# EAGLE board rc_rx (EAGLE 7.0.0)

Size 100 x 80 mm. Coordinates in mm from the lower left corner, seen from the top.
Outline: 0,0 100,0 100,80 0,80 0,0
Copper layers (1*16): Top 0.035mm / dielectric 1.5mm / Bottom 0.035mm
Design rules "default": minimum track width 10mil, minimum drill 24mil, track to track 8mil, track to pad 8mil, pad to pad 8mil, via to via 8mil, smd to smd 8mil, copper to edge 40mil, drill to drill 8mil, minimum pad ring 10mil, minimum via ring 8mil, stop-mask expansion 4mil, vias tented up to drill 0mil, thermal gap 10mil

## Footprints (pad centres in the part's own frame; a part is rotated, then mirrored left to right if it is on the bottom)
C025-025X050 = drill 0.813 octagon: 1 -1.27,0; 2 1.27,0
E3,5-8 = drill 0.813 pad 1.6: + -1.778,0 | drill 0.813 pad 1.6 octagon: - 1.778,0
DIL18 = drill 0.813 long: 1 -10.16,-3.81; 2 -7.62,-3.81; 3 -5.08,-3.81; 4 -2.54,-3.81; 5 0,-3.81; 6 2.54,-3.81; 7 5.08,-3.81; 8 7.62,-3.81; 9 10.16,-3.81; 10 10.16,3.81; 11 7.62,3.81; 12 5.08,3.81; 13 2.54,3.81; 14 0,3.81; 15 -2.54,3.81; 16 -5.08,3.81; 17 -7.62,3.81; 18 -10.16,3.81
SOT223 = smd 1.5 x 2: 1 -2.3,-3.15; 2 0,-3.15; 3 2.3,-3.15 | smd 3.8 x 2: 4 0,3.15
1X03 = drill 1.016 long: 1 -2.54,0; 2 0,0; 3 2.54,0
1X05 = drill 1.016 long: 1 -5.08,0; 2 -2.54,0; 3 0,0; 4 2.54,0; 5 5.08,0
3,81/1,4 = drill 1.397 pad 3.81 octagon: 1 0,0
D2PACK = smd 2.083 x 3.81: 1 -2.54,-8.89; 3 2.54,-8.89 | smd 11.43 x 8.89: 2 0,2.54
0204/7 = drill 0.813 octagon: 1 -3.81,0; 2 3.81,0
R1210 = smd 1.6 x 2.7: 1 -1.4,0; 2 1.4,0
S02P = drill 1.016 long: 1 1.25,0; 2 -1.25,0

## Placement (x,y rotation side)
C1  100nF  [C025-025X050]  55.88,36.83 270 top
C2  10uF  [E3,5-8]  50.8,27.94 90 top
IC1  PIC16F1826/27P  [DIL18]  31.75,36.83 0 top
IC2  LD117AS50TR  [SOT223]  49.53,36.83 90 top
JP1  [1X03]  10.16,26.67 270 top
JP2  [1X03]  13.97,26.67 270 top
JP3  [1X03]  17.78,26.67 270 top
JP4  ICSP  [1X05]  36.83,22.86 180 top
JP5  USART  [1X05]  10.16,39.37 270 top
PAD1  [3,81/1,4]  33.02,63.5 0 top
PAD2  [3,81/1,4]  33.02,49.53 0 top
Q1  IRF3704S  [D2PACK]  15.24,53.34 90 top
Q2  IRF3704S  [D2PACK]  50.8,53.34 270 top
R1  220  [0204/7]  30.48,29.21 180 top
R2  0.2  [R1210]  36.83,54.61 90 top
R3  220  [0204/7]  43.18,45.72 0 top
R4  430  [0204/7]  24.13,26.67 270 top
R5  220  [0204/7]  25.4,46.99 180 top
R6  220  [0204/7]  22.86,44.45 180 top
R7  [0204/7]  17.78,36.83 270 top
R8  [0204/7]  15.24,36.83 90 top
R9  430  [0204/7]  33.02,26.67 0 top
R10  430  [0204/7]  44.45,29.21 90 top
R11  430  [0204/7]  45.72,43.18 180 top
R12  0.2  [R1210]  29.21,54.61 90 top
R13  430  [0204/7]  21.59,26.67 90 top
SV1  [S02P]  22.86,63.5 180 top
SV2  [S02P]  43.18,63.5 0 top

## Library data of the parts
C1 C2 = rcl
IC1 = microchip
IC2 = v-reg
JP1-JP5 = pinhead
PAD1 PAD2 = wirepad
Q1 Q2 = transistor-power
R1 R3-R11 R13 = resistor
R2 R12 = eagle-ltspice; SPICEMODEL: NONE; SPICEPREFIX: R
SV1 SV2 = con-amp-mt; OC_FARNELL: unknown; OC_NEWARK: unknown

## Nets
CH1_IN: IC1.7 R9.2
CH2_IN: IC1.9 R10.2
CH3_IN: IC1.10 R11.2
CRR_SNS: Q1.3 R12.2 R13.1
FLT1: IC1.2 R4.1
FLT2: IC1.1 R13.2
GND: C1.2 C2.- IC1.5 IC2.1 JP1.1 JP2.1 JP3.1 JP4.3 JP5.5 PAD2.1 R2.1 R7.1 R12.1
N$1: Q2.1 R1.2 R3.2
N$2: Q1.1 R5.2 R6.2
N$3: Q2.2 SV2.1
N$4: Q1.2 SV1.1
N$5: JP1.3 R9.1
N$6: JP2.3 R10.1
N$7: JP3.3 R11.1
N$8: Q2.3 R2.2 R4.2
P1A: IC1.6 R1.1
P1B: IC1.11 R3.1
P2A: IC1.16 R6.1
P2B: IC1.15 R5.1
PGC: IC1.12 JP4.1
PGD: IC1.13 JP4.2
RTS: JP5.1
RX: JP5.3
TX: IC1.8 JP5.2
V+: C1.1 IC2.3 PAD1.1 R8.2 SV1.2 SV2.2
VBAT_SNS: IC1.3 R7.2 R8.1
VDD: C2.+ IC1.14 IC2.4 JP1.2 JP2.2 JP3.2 JP4.4 JP5.4
VPP: IC1.4 JP4.5

## Tracks (layer width: path | path; a pad name or v marks a point on that pad's centre or on a via)
CH1_IN  (1 unrouted)
CH2_IN  (1 unrouted)
CH3_IN  (1 unrouted)
CRR_SNS  (2 unrouted)
FLT1  (1 unrouted)
FLT2  (1 unrouted)
GND  (12 unrouted)
N$1  (2 unrouted)
N$2  (2 unrouted)
N$3  (1 unrouted)
N$4  (1 unrouted)
N$5  (1 unrouted)
N$6  (1 unrouted)
N$7  (1 unrouted)
N$8  (2 unrouted)
P1A  (1 unrouted)
P1B  (1 unrouted)
P2A  (1 unrouted)
P2B  (1 unrouted)
PGC  (1 unrouted)
PGD  (1 unrouted)
TX  (1 unrouted)
V+  (5 unrouted)
VBAT_SNS  (2 unrouted)
VDD  (7 unrouted)
VPP  (1 unrouted)